# Altium PCB interface.PcbDoc (part 1 of 2)
Units mm, origin at the board's own origin, x right, y up, seen from the top; angles counter-clockwise.
Board outline 50 x 100 mm, 4 copper layers (Top Copper, GND, Supply, Bot Copper), stack 1.56 mm thick; 82 components, 62 nets, 291 pads, 101 vias.
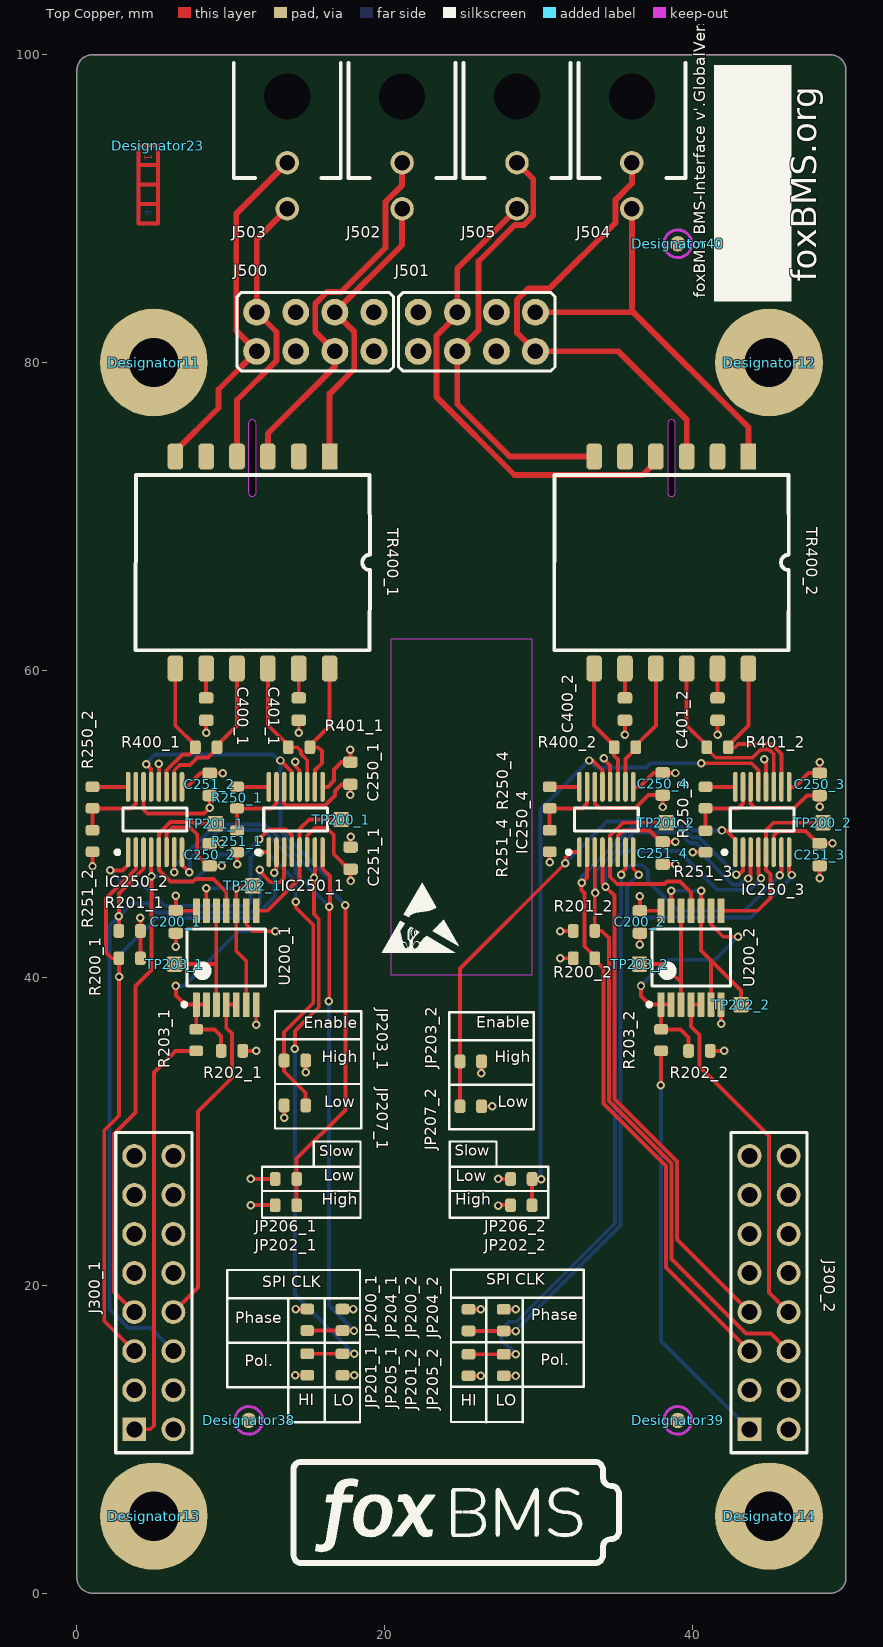
[diagram p0: Top Copper view]
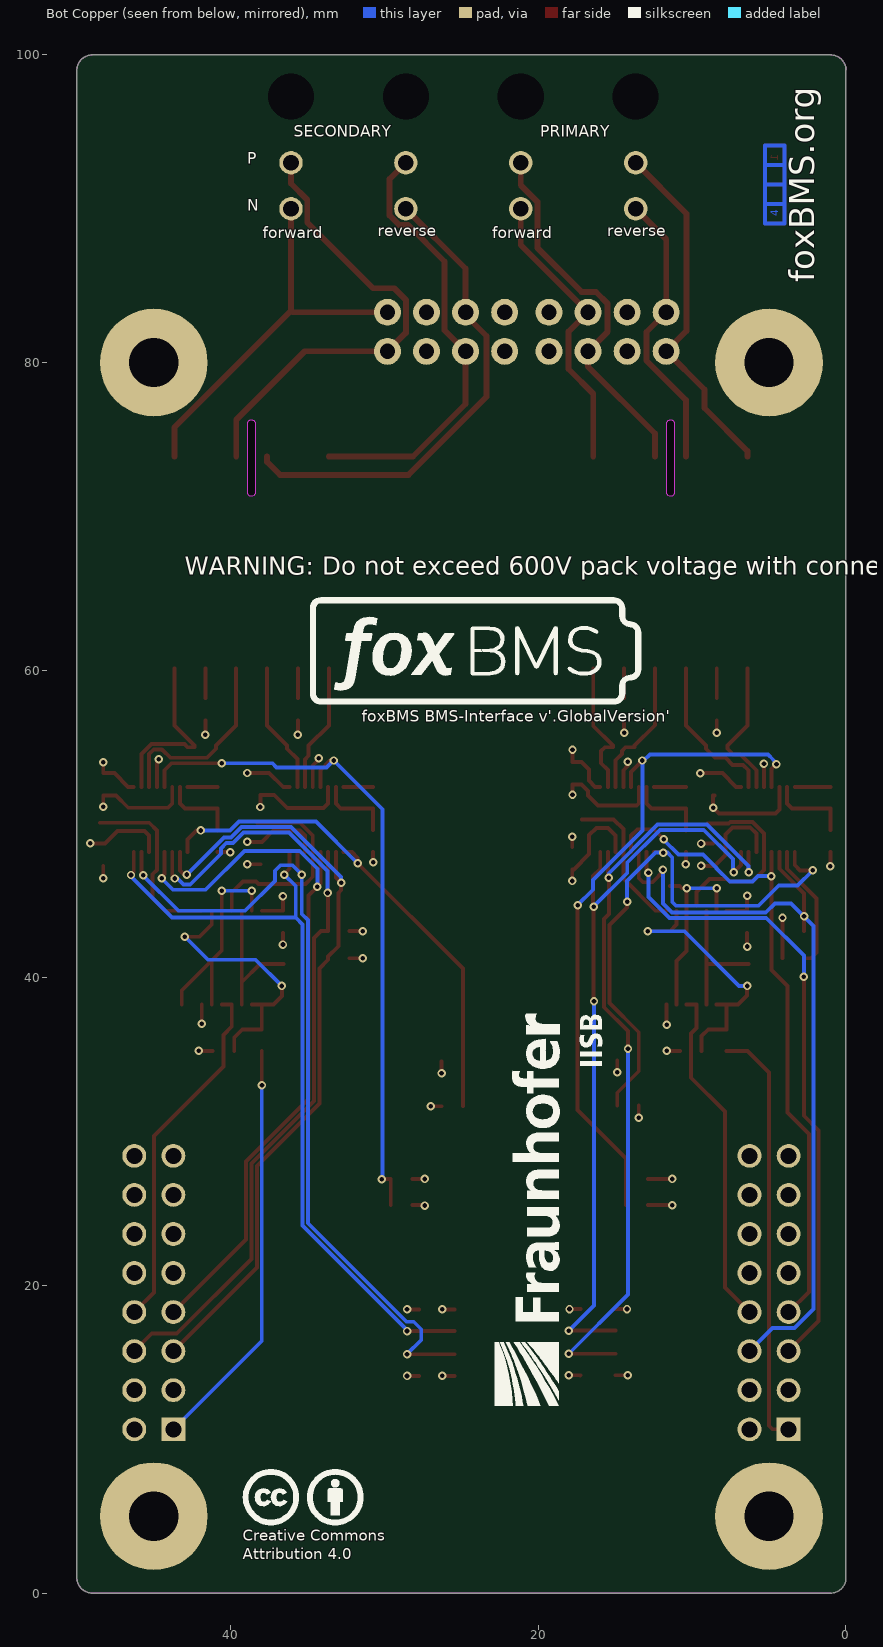
[diagram p1: Bot Copper view, seen from below]
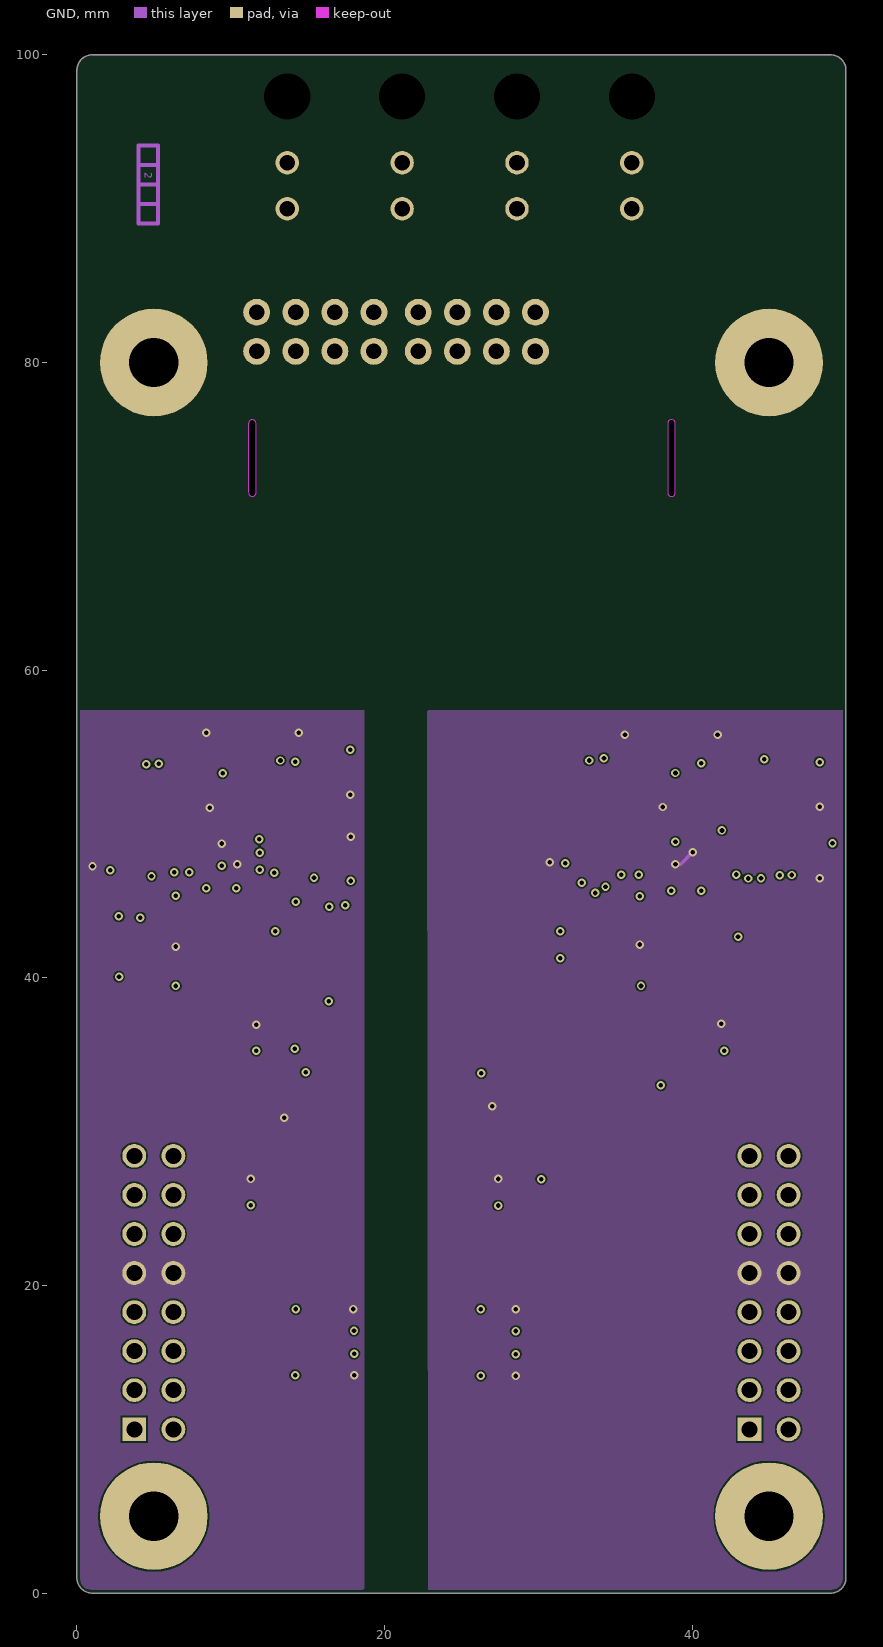
[diagram p2: GND]
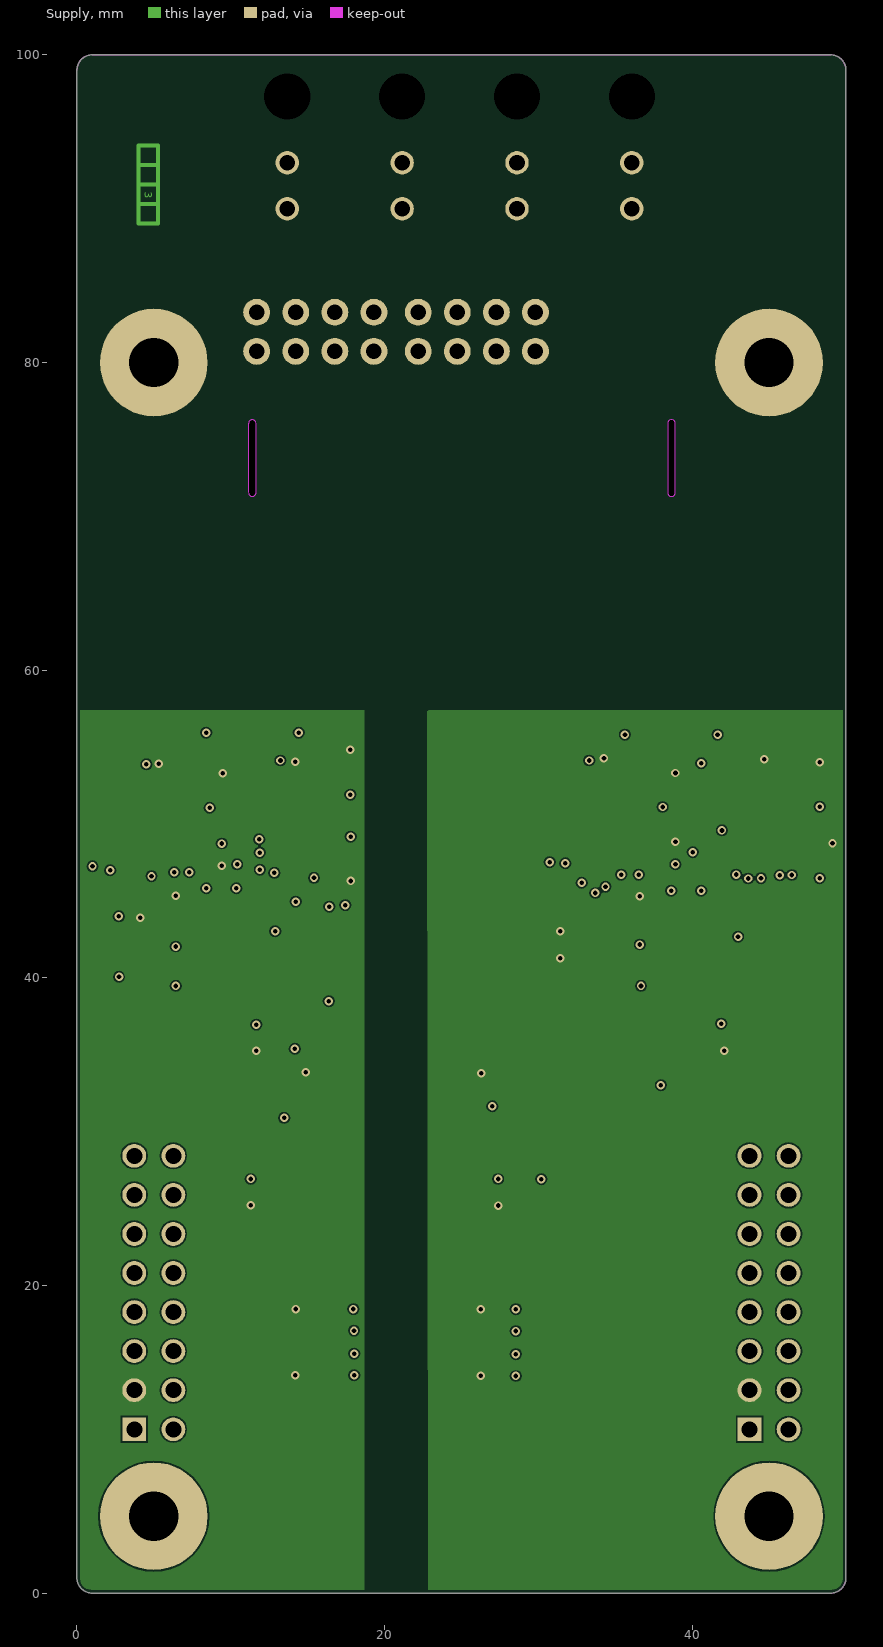
[diagram p3: Supply]

## Layer stack, top to bottom
Top Solder: solder mask 0.015, Solder Resist, Dk 3.5
Top Copper: signal copper 0.035
Dielectric 1: prepreg 0.36, FR-4, Dk 4.6
GND: signal copper 0.035
Dielectric 2: core 0.7, FR-4, Dk 4.6
Supply: signal copper 0.035
Dielectric 3: prepreg 0.36, FR-4, Dk 4.6
Bot Copper: signal copper 0.035
Bottom Solder: solder mask 0.015, Solder Resist, Dk 3.5

## Board outline
0,1 0,99 cw(c1,99) 1,100 49,100 cw(c49,99) 50,99 50,1 cw(c49,1) 49,0 1,0 cw(c1,1)
cut-out: 38.405,71.552 ccw(c38.655,71.552) 38.905,71.552 38.905,76.022 ccw(c38.655,76.022) 38.405,76.022
cut-out: 11.154,71.552 ccw(c11.405,71.552) 11.655,71.552 11.655,76.022 ccw(c11.405,76.022) 11.154,76.022

## Design rules (kind name [scope] priority, off if disabled: settings)
AssemblyTestPointUsage [All] p1 off:
AssemblyTestpoint [(IsPad And (OnTopLayer Or OnBottomLayer)) Or (IsPad And OnMultiLayer)] p1 off: testpointundercomponent=FALSE minsize=1.016 maxsize=2.54 preferedsize=1.524 minholesize=0 maxholesize=1.016 preferedholesize=0.813 testpointgrid=0.025 usegrid=TRUE gridtolerance=0 allowsidetop=TRUE
BoardOutlineClearance [All] p1: gap=0.203 ignorepadtopadclearanceinfootprint=FALSE except(0.508: Arc-CavityEdge Track-CavityEdge SMDPad-CavityEdge THPad-CavityEdge Via-CavityEdge Fill-CavityEdge Poly-CavityEdge Region-CavityEdge Text-CavityEdge)
Clearance [All] p1: gap=0.102 ignorepadtopadclearanceinfootprint=TRUE except(0.152: Arc-Text Arc-Hole Track-Text Track-Hole SMDPad-Text SMDPad-Hole THPad-Text THPad-Hole Via-Text Via-Hole Fill-Text Fill-Hole Poly-Text Poly-Hole Region-Text Region-Hole Text-Text Text-Hole; 0.203: Arc-Via Track-Via SMDPad-Via THPad-Via Via-Via)
DiffPairsRouting [All] p1: maxlimit=0.254 minlimit=0.254 mostfreqgap=0.254 toplayer_minwidth=0.381 toplayer_maxwidth=0.381 toplayer_prefwidth=0.381 midlayer1_minwidth=0.381 midlayer1_maxwidth=0.381 midlayer1_prefwidth=0.381 midlayer2_minwidth=0.381 midlayer2_maxwidth=0.381 midlayer2_prefwidth=0.381 bottomlayer_minwidth=0.381 bottomlayer_maxwidth=0.381 bottomlayer_prefwidth=0.381 maxuncoupledlength=12.7
FabricationTestpoint [All] p1: side=1 testpointundercomponent=TRUE minsize=0.508 maxsize=7.62 preferedsize=1.524 minholesize=0 maxholesize=1.05 preferedholesize=0.813 testpointgrid=0.025 allowsidetop=TRUE usegrid=FALSE gridtolerance=0
HoleSize [All] p1: absolutevalues=TRUE maxlimit=5.994 minlimit=0.2 maxpercent=80.000 minpercent=20.000
HoleToHoleClearance [All] p1: gap=0.152 allowstackedmicrovias=TRUE
MinimumAnnularRing [All] p1: minimumring=0.102
MinimumSolderMaskSliver [All] p1: minsoldermaskwidth=0.102
PlaneConnect [All] p1: planeconnectstyle=Direct reliefexpansion=0.508 reliefentries=4 reliefconductorwidth=0.254 reliefairgap=0.254
PolygonConnect [All] p1: connectstyle=Direct reliefconductorwidth=0.254 reliefentries=4 polygonreliefangle="90 Angle" airgapwidth=0.254
RoutingVias [All] p1: holewidth=0.203 width=0.45 viastyle="Through Hole" minholewidth=0.203 minwidth=0.45 maxholewidth=1 maxwidth=7 useviatemplates=TRUE viatemplateguid#1={D0A3D638-558F-4074-B05B-B31E3332276D} viatemplatename#1=0.3mm_tented
SMDEntry [All] p1: side=TRUE corner=TRUE anyangle=FALSE
SMDToCorner [All] p1: distance=40000
SilkToSolderMaskClearance [IsPad] p1: minsilkscreentomaskgap=0.102 clearancetoexposedcopper=FALSE
SolderMaskExpansion SolderMaskExpansion_VIAs [IsVia] p1: expansion=-10 // Cover all Vias
SolderMaskExpansion [All] p2: expansion=0.051
UnRoutedNet [All] p1: checkbadconnections=TRUE
UnpouredPolygon UnpouredPolygon_1 [All] p1:
Width [All] p1: maxlimit=1.524 minlimit=0.102 preferedwidth=0.152
19 further rules are at their usual default settings.

## Classes and differential pairs
channel class MCU_connector: "Primary MCU Connector" "Secondary MCU Connector"
channel class LTC6820_chip: "LTC6820 forward1" "LTC6820 forward2" "LTC6820 reverse1" "LTC6820 reverse2"
channel class LTC6820: "Primary LTC6820" "Secondary LTC6820"
channel class daisy-chain_isolation: "Primary Galvanic Isolation" "Secondary Galvanic Isolation"
component class "Secondary MCU Connector": J300_2
component class "Secondary LTC6820": C200_2 JP200_2 JP201_2 JP202_2 JP203_2 JP204_2 JP205_2 JP206_2 JP207_2 R200_2 R201_2 R202_2 R203_2 TP200_2 TP201_2 TP202_2 TP203_2 U200_2
component class "Secondary Galvanic Isolation": C400_2 C401_2 R400_2 R401_2 TR400_2
component class "Primary MCU Connector": J300_1
component class "Primary LTC6820": C200_1 JP200_1 JP201_1 JP202_1 JP203_1 JP204_1 JP205_1 JP206_1 JP207_1 R200_1 R201_1 R202_1 R203_1 TP200_1 TP201_1 TP202_1 TP203_1 U200_1
component class "Primary Galvanic Isolation": C400_1 C401_1 R400_1 R401_1 TR400_1
component class "LTC6820 reverse2": C250_4 C251_4 IC250_4 R250_4 R251_4
component class "LTC6820 reverse1": C250_2 C251_2 IC250_2 R250_2 R251_2
component class "LTC6820 forward2": C250_3 C251_3 IC250_3 R250_3 R251_3
component class "LTC6820 forward1": C250_1 C251_1 IC250_1 R250_1 R251_1
component class Board-to-Board-connector: J500 J501 J502 J503 J504 J505
polygon class PolygonThermal_ON_Width60000_Gap78740: Polygon_1_Net_+3.3V_0 Polygon_1_Net_GND_0
differential pair OUT_secondary: +OUT_secondary_P -OUT_secondary_N
differential pair OUT_reverse_secondary: +OUT_reverse_secondary_P -OUT_reverse_secondary_N
differential pair OUT_reverse_primary: +OUT_reverse_primary_P -OUT_reverse_primary_N
differential pair OUT_primary: +OUT_primary_P -OUT_primary_N
differential pair OUT_4: +OUT_4_P -OUT_4_N
differential pair OUT_3: +OUT_3_P -OUT_3_N
differential pair OUT_2: +OUT_2_P -OUT_2_N
differential pair OUT_1: +OUT_1_P -OUT_1_N

## Components (designator, comment, footprint, x,y, rotation, side; value= is the part's Value field where it differs from the comment)
C200_1 "100n/50V" CAPC1608X08N 6.43,43.636 r90 top (schematic designator C200)
C200_2 "100n/50V" CAPC1608X08N 36.602,43.636 r90 top (schematic designator C200)
C250_1 "100n/50V" CAPC1608X08N 17.78,53.303 r90 top (schematic designator C250)
C250_2 "100n/50V" CAPC1608X08N 8.636,48.006 r270 top (schematic designator C250)
C250_3 "100n/50V" CAPC1608X08N 48.285,52.578 r90 top (schematic designator C250)
C250_4 "100n/50V" CAPC1608X08N 38.075,52.603 r90 top (schematic designator C250)
C251_1 "100n/50V" CAPC1608X08N 17.795,47.777 r270 top (schematic designator C251)
C251_2 "100n/50V" CAPC1608X08N 8.636,52.578 r90 top (schematic designator C251)
C251_3 "100n/50V" CAPC1608X08N 48.285,48.006 r90 top (schematic designator C251)
C251_4 "100n/50V" CAPC1608X08N 38.075,48.108 r90 top (schematic designator C251)
C400_1 "27p/50V" CAPC1608X08N 8.404,57.468 r90 top locked (schematic designator C400)
C400_2 "27p/50V" CAPC1608X08N 35.63,57.468 r90 top locked (schematic designator C400)
C401_1 "27p/50V" CAPC1608X08N 14.423,57.468 r90 top locked (schematic designator C401)
C401_2 "27p/50V" CAPC1608X08N 41.649,57.468 r90 top locked (schematic designator C401)
Designator11 "Comment" Hole_3.2_Iso 5,80 r0 top
Designator12 "Comment" Hole_3.2_Iso 45,80 r0 top
Designator13 "Comment" Hole_3.2_Iso 5,5 r0 top
Designator14 "Comment" Hole_3.2_Iso 45,5 r0 top
Designator23 "Comment" layermarker4 5.266,94.107 r270 top
Designator38 "Comment" Fiducial_2 11.177,11.229 r0 top
Designator39 "Comment" Fiducial_2 39.066,11.229 r0 top
Designator40 "Comment" Fiducial_2 39.066,87.722 r0 top
IC250_1 "LTC6820HMS#PBF" LT-MS-16_M 14.224,50.292 r90 top (schematic designator IC250)
IC250_2 "LTC6820HMS#PBF" LT-MS-16_M 5.08,50.292 r90 top (schematic designator IC250)
IC250_3 "LTC6820HMS#PBF" LT-MS-16_M 44.552,50.292 r90 top (schematic designator IC250)
IC250_4 "LTC6820HMS#PBF" LT-MS-16_M 34.417,50.292 r90 top (schematic designator IC250)
J300_1 "SSW-108-01-G-D" SMTC-SSW-108-01-X-D 3.73,10.65 r90 top locked (schematic designator J300)
J300_2 "SSW-108-01-G-D" SMTC-SSW-108-01-X-D 43.73,10.65 r90 top locked (schematic designator J300)
J500 "TE_534206-4" TE_534206-4 15.5,82 r0 top locked
J501 "TE_534206-4" TE_534206-4 26,82 r0 top locked
J502 "molex_microfit_3_01x2_THT" MOLEX_MICROFIT_01x2_THT 21.144,97.307 r0 top locked
J503 "molex_microfit_3_01x2_THT" MOLEX_MICROFIT_01x2_THT 13.676,97.307 r0 top locked
J504 "molex_microfit_3_01x2_THT" MOLEX_MICROFIT_01x2_THT 36.079,97.307 r0 top locked
J505 "molex_microfit_3_01x2_THT" MOLEX_MICROFIT_01x2_THT 28.612,97.307 r0 top locked
JP200_1 "0R" RESC1608X05N 14.978,17.767 r90 top locked (schematic designator JP200)
JP200_2 "0R" RESC1608X05N 25.464,17.748 r90 top locked (schematic designator JP200)
JP201_1 "0R" RESC1608X05N 14.978,14.863 r270 top locked (schematic designator JP201)
JP201_2 "0R" RESC1608X05N 25.464,14.827 r270 top locked (schematic designator JP201)
JP202_1 "0R" RESC1608X05N 13.589,25.22 r180 top locked (schematic designator JP202)
JP202_2 "0R" RESC1608X05N 28.894,25.22 r180 top locked (schematic designator JP202)
JP203_1 "0R" RESC1608X05N 14.172,34.626 r0 top locked (schematic designator JP203)
JP203_2 "0R" RESC1608X05N 25.609,34.569 r0 top locked (schematic designator JP203)
JP204_1 "0R" RESC1608X05N 17.264,17.767 r270 top (schematic designator JP204)
JP204_2 "0R" RESC1608X05N 27.75,17.748 r270 top locked (schematic designator JP204)
JP205_1 "0R" RESC1608X05N 17.264,14.863 r90 top locked (schematic designator JP205)
JP205_2 "0R" RESC1608X05N 27.75,14.827 r90 top locked (schematic designator JP205)
JP206_1 "0R" RESC1608X05N 13.589,26.924 r0 top (schematic designator JP206)
JP206_2 "0R" RESC1608X05N 28.894,26.924 r0 top locked (schematic designator JP206)
JP207_1 "0R" RESC1608X05N 14.172,31.705 r0 top locked (schematic designator JP207)
JP207_2 "0R" RESC1608X05N 25.609,31.648 r180 top locked (schematic designator JP207)
R200_1 "2k" RESC1608X05N 3.429,41.275 r0 top locked (schematic designator R200)
R200_2 "2k" RESC1608X05N 32.969,41.275 r180 top locked (schematic designator R200)
R201_1 "2k" RESC1608X05N 3.429,43.053 r0 top locked (schematic designator R201)
R201_2 "2k" RESC1608X05N 32.969,43.053 r180 top locked (schematic designator R201)
R202_1 "20k" RESC1608X05N 10.081,35.253 r0 top locked (schematic designator R202)
R202_2 "20k" RESC1608X05N 40.468,35.253 r0 top locked (schematic designator R202)
R203_1 "0R" RESC1608X05N 7.763,35.953 r90 top locked (schematic designator R203)
R203_2 "0R" RESC1608X05N 37.982,35.953 r90 top locked (schematic designator R203)
R250_1 "806R" RESC1608X05N 10.414,51.717 r90 top locked (schematic designator R250)
R250_2 "806R" RESC1608X05N 1.016,51.717 r90 top locked (schematic designator R250)
R250_3 "806R" RESC1608X05N 40.869,51.717 r90 top locked (schematic designator R250)
R250_4 "806R" RESC1608X05N 30.738,51.717 r90 top locked (schematic designator R250)
R251_1 "1k2" RESC1608X05N 10.414,48.867 r90 top locked (schematic designator R251)
R251_2 "1k2" RESC1608X05N 1.016,48.895 r90 top locked (schematic designator R251)
R251_3 "1k2" RESC1608X05N 40.869,48.867 r90 top locked (schematic designator R251)
R251_4 "1k2" RESC1608X05N 30.738,48.895 r90 top locked (schematic designator R251)
R400_1 "120R" RESC1608X05N 8.404,54.991 r0 top locked (schematic designator R400)
R400_2 "120R" RESC1608X05N 35.63,54.991 r0 top locked (schematic designator R400)
R401_1 "120R" RESC1608X05N 14.446,54.991 r0 top locked (schematic designator R401)
R401_2 "120R" RESC1608X05N 41.649,54.991 r0 top locked (schematic designator R401)
TP200_1 "Testpoint_Square" Testpoint_S1 17.181,50.292 r90 top locked (schematic designator TP200)
TP200_2 "Testpoint_Square" Testpoint_S1 48.503,50.083 r90 top locked (schematic designator TP200)
TP201_1 "Testpoint_Square" Testpoint_S1 9.004,50.02 r90 top locked (schematic designator TP201)
TP201_2 "Testpoint_Square" Testpoint_S1 38.31,50.083 r90 top locked (schematic designator TP201)
TP202_1 "Testpoint_Square" Testpoint_S1 11.43,45.974 r90 top locked (schematic designator TP202)
TP202_2 "Testpoint_Square" Testpoint_S1 43.18,38.261 r90 top locked (schematic designator TP202)
TP203_1 "Testpoint_Square" Testpoint_S1 6.35,40.894 r90 top locked (schematic designator TP203)
TP203_2 "Testpoint_Square" Testpoint_S1 36.576,40.894 r90 top locked (schematic designator TP203)
TR400_1 "HM2102NL" HM2102NL 11.43,66.992 r270 top locked (schematic designator TR400)
TR400_2 "HM2102NL" HM2102NL 38.656,66.992 r270 top locked (schematic designator TR400)
U200_1 "SN74LVC00APWR" PW0014A_M 9.713,41.311 r90 top (schematic designator U200)
U200_2 "SN74LVC00APWR" PW0014A_M 39.932,41.311 r90 top (schematic designator U200)

## Footprints (in the part's own frame and the unit in brackets; to place one, negate y for a bottom-side part, rotate by r counter-clockwise, add the part's x,y. Pads: shape width x height; smd on the part's side, far side on the other; paste and mask are expansions set on the pad)
CAPC1608X08N [mm] "Chip Capacitor, 2-Leads, Body 1,60x0,80mm, IPC Medium Density"
  rrect50% 0.75x0.95 smd: 1(-0.725,0) 2(0.725,0)
  body extent -0.85,-0.45 0.85,0.45, height 0.8
Fiducial_2 [mm] "Fiducial Round 1mm"
  round 1 smd paste-0.5 mask+0.5: 0(0,0)
  Top Copper keep-out circle w0.2: c0,0 r0.9
HM2102NL [mil]
  rect 67.5x40 smd: 1(-271.65,196.85)
  rrect50% 67.5x40 smd: 2(-271.65,117.85) 3(-271.65,38.85) 4(-271.65,-40.15) 5(-271.65,-119.15) 6(-271.65,-198.15) 7(270.85,-198.15) 8(270.85,-119.15) 9(270.85,-40.15) 10(270.85,38.85) 11(270.85,117.85) 12(270.85,196.85)
  silkscreen extent -224,-300 224,300, body extent -224,-299 224,299, height 197
Hole_3.2_Iso [mm]
  round 7 hole 3.2: Hole_3.2(0,0)
layermarker4 [mm] "Marker for a 4 layerstack"
  Top Copper lines w0.254: 3.81,-1.27 5.08,-1.27 5.08,0 3.81,0 ; 3.81,-1.27 3.81,0 ; 3.81,-1.27 2.54,-1.27 ; 2.54,-1.27 2.54,0 ; 2.54,-1.27 1.27,-1.27 ; 1.27,-1.27 0,-1.27 0,0 1.27,0 ; 1.27,-1.27 1.27,0 ; 3.81,0 2.54,0 ; 2.54,0 1.27,0
  GND lines w0.254: 3.81,-1.27 2.54,-1.27 ; 3.81,-1.27 3.81,0 ; 3.81,-1.27 5.08,-1.27 5.08,0 3.81,0 ; 2.54,-1.27 2.54,0 ; 2.54,-1.27 1.27,-1.27 ; 1.27,-1.27 1.27,0 ; 1.27,-1.27 0,-1.27 0,0 1.27,0 ; 3.81,0 2.54,0 ; 2.54,0 1.27,0
  Supply lines w0.254: 3.81,-1.27 2.54,-1.27 ; 3.81,-1.27 3.81,0 ; 3.81,-1.27 5.08,-1.27 5.08,0 3.81,0 ; 2.54,-1.27 2.54,0 ; 2.54,-1.27 1.27,-1.27 ; 1.27,-1.27 1.27,0 ; 1.27,-1.27 0,-1.27 0,0 1.27,0 ; 3.81,0 2.54,0 ; 2.54,0 1.27,0
  Bot Copper lines w0.254: 3.81,-1.27 2.54,-1.27 ; 3.81,-1.27 3.81,0 ; 3.81,-1.27 5.08,-1.27 5.08,0 3.81,0 ; 2.54,-1.27 2.54,0 ; 2.54,-1.27 1.27,-1.27 ; 1.27,-1.27 1.27,0 ; 1.27,-1.27 0,-1.27 0,0 1.27,0 ; 3.81,0 2.54,0 ; 2.54,0 1.27,0
LT-MS-16_M [mm] "SOP, 16-Leads, Body 4.04x3.00mm, Pitch 0.50mm, IPC Low Density"
  oval 1.95x0.3 smd: 1(-2.125,1.75) 2(-2.125,1.25) 3(-2.125,0.75) 4(-2.125,0.25) 5(-2.125,-0.25) 6(-2.125,-0.75) 7(-2.125,-1.25) 8(-2.125,-1.75) 9(2.125,-1.75) 10(2.125,-1.25) 11(2.125,-0.75) 12(2.125,-0.25) 13(2.125,0.25) 14(2.125,0.75) 15(2.125,1.25) 16(2.125,1.75)
  silkscreen extent -2.25,-2.08 0.75,2.57, body extent -1.55,-2.05 1.55,2.05, height 1.1
MOLEX_MICROFIT_01x2_THT [mil] "Micro-Fit 3.0 Right Angle Header, 3.00mm Pitch, Dual Row, 2 Circuits, with Snap-in Plastic Peg PCB Lock, Tin, Glow Wire Capable, Black, 43045-0200"
  round 60 hole 40: 1(0,-170) 2(0,-287.99)
  round 39.37 hole 117.99 unplated paste+0 mask+4: ""(0,0)
  silkscreen extent -137,-209 137,85, body extent -141,-301 141,181, height 345
PW0014A_M [mm] "SOP, 14-Leads, Body 5.1x4.5mm, Pitch 0.65mm, IPC Low Density"
  rrect22% 1.6x0.45 smd: 1(-3.05,1.95) 2(-3.05,1.3) 3(-3.05,0.65) 4(-3.05,0) 5(-3.05,-0.65) 6(-3.05,-1.3) 7(-3.05,-1.95) 8(3.05,-1.95) 9(3.05,-1.3) 10(3.05,-0.65) 11(3.05,0) 12(3.05,0.65) 13(3.05,1.3) 14(3.05,1.95)
  silkscreen extent -3.17,-2.55 1.85,2.85, body extent -3.21,-2.5 3.21,2.5, height 1
RESC1608X05N [mm] "Chip Resistor, 2-Leads, Body 1,60x0,80mm, IPC Medium Density"
  rrect50% 0.7x0.9 smd: 1(-0.7,0) 2(0.7,0)
  body extent -0.85,-0.45 0.85,0.45, height 0.45
SMTC-SSW-108-01-X-D [mm] "SQ Post Socket, 2x8 Pins, Vertical, 2.54mm Pitch, Female"
  rect 1.55x1.55 hole 1.04: 1(0,0)
  round 1.55 hole 1.04: 2(0,-2.54) 3(2.54,0) 4(2.54,-2.54) 5(5.08,0) 6(5.08,-2.54) 7(7.62,0) 8(7.62,-2.54) 9(10.16,0) 10(10.16,-2.54) 11(12.7,0) 12(12.7,-2.54) 13(15.24,0) 14(15.24,-2.54) 15(17.78,0) 16(17.78,-2.54)
  silkscreen extent -1.53,-3.74 19.31,1.2, body extent -1.52,-3.75 19.3,1.21, height 8.51
TE_534206-4 [mm] "Board-To-Board Connector, Dual, 2.54 mm, 8 Contacts, Receptacle, Through Hole, 2 Rows"
  round 1.75 hole 1: 1(3.81,-1.27) 2(3.81,1.27) 3(1.27,-1.27) 4(1.27,1.27) 5(-1.27,-1.27) 6(-1.27,1.27) 7(-3.81,-1.27) 8(-3.81,1.27)
  silkscreen extent -5.08,-2.54 5.08,2.54, body extent -5.08,-2.51 5.08,2.51, height 8.65
Testpoint_S1 [mm] "Testpunkt, quardratisch 1mm"
  rrect20% 1x1 smd paste-0.5: 1(0,0)

## Part data
C200_1 C200_2 C250_1 C250_2 C250_3 C250_4 C251_1 C251_2 C251_3 C251_4: library part gen_C_ceramic_100n_50V_X7R_0603, "MLCC", Capacitance=100n, Case EIA=0603, Case Metric=1608, Dielectric=X7R, PnP Package=C_0603_10, PnP Value=100n/50V/X7R, Rated Voltage=50V, Supplier Part Number 1=2525267, Automotive Qualified=True, Part Number=gen_C_ceramic_100n_50V_X7R_0603, PnP equipped=x, Supplier 1=Farnell, Supplier 2=Digikey, Supplier 3=Farnell, Supplier Part Number 2=490-6049-1-ND, Supplier Part Number 3=2070398
C400_1 C400_2 C401_1 C401_2: library part gen_C_ceramic_27p_50V_NP0_0603, "MLCC", Capacitance=27p, Case EIA=0603, Case Metric=1608, Dielectric=NP0, PnP Package=C_0603_05, Rated Voltage=50V, Supplier Part Number 1=2219430, Automotive Qualified=True, Part Number=gen_C_ceramic_27p_50V_NP0_0603, Supplier 1=Farnell
Designator23: library part Layer_Marker_4_Layers
Designator38 Designator39 Designator40: library part Fiducial_2
IC250_1 IC250_2 IC250_3 IC250_4: library part CMP-0937-00009-1, "IsoSPI Isolated Communication Interface, 2.7 to 5.5 V, -40 to 125 degC, 16-Pin MSOP (MS), Pb-Free", IO Supply Current="1 uA Max.", IO Supply Voltage Range="1.7 to 5.5 V", Manufacturer="Linear Technology", Power Supply="2.7 to 5.5 V", Receiver Input Resistance="35 kOhm", Supply Current, IDLE State="2 uA", Temperature Range (degC)="-40 to 125", ComponentLink1Description="Manufacturer URL", ComponentLink1URL=http://www.linear.com/, ComponentLink2Description=Datasheet, ComponentLink2URL=http://cds.linear.com/docs/en/datasheet/6820fa.pdf, ComponentLink3Description="Package Specification", ComponentLink3URL=http://cds.linear.com/docs/en/packaging/05081669_A_MS16.pdf, DatasheetVersion="Rev. A", Mounting Technology="Surface Mount", PackageDescription="16-Pin Micro Small Outline Package, Body 4.039 x 3 mm, Pitch 0.5 mm", PackageReference=MS-16, PackageVersion="Rev. A", PartNumber=LTC6820HMS#PBF, VBIAS="1.9 to 2.1 V"
J300_1 J300_2: library part CMP-1023-00374-1, "SQ Post Socket, Through-hole, Vertical, -55 to 125 degC, 2.54mm Pitch, 16-Pin, Female, RoHS", Manufacturer=Samtec, Temperature Range="-55 to 125 degC", ComponentLink1Description="Manufacturer URL", ComponentLink1URL=http://www.samtec.com, ComponentLink2Description=Datasheet, ComponentLink2URL=http://www.samtec.com/documents/webfiles/pdf/SSW_TH.PDF, ComponentLink3Description="Package Specification", ComponentLink3URL=http://www.samtec.com/documents/webfiles/cpdf/SSW-1XX-XX-XXX-X-XX-XXX-XX-MKT.pdf, DatasheetVersion=F-214, Mounting Technology=Through-hole, Orientation=Vertical, PackageDescription="Assembly, Socket Strip .016 X .031 Tail", PackageReference=SSW-108-01-X-D, PackageVersion="CA, 6/1987", PartNumber=SSW-108-01-G-D, Pitch="2.54 mm", RoHS=True
J500 J501: "Board-To-Board Connector, Dual, 2.54 mm, 8 Contacts, Receptacle, Through Hole, 2 Rows", Manufacturer=TE, Operating Temperature="-65 °C - +105 °C", Part Name=534206-4, Rated Current=2A, Rated Voltage="333V AC", Supplier Part Number 1=A26454-ND, Automotive Qualified=False, Circuits=8, ComponentLink1Description=Datasheet, ComponentLink1URL=https://www.te.com/deu-de/product-534206-4.html#pdp-docs-features, Part Number=TE_534206-4, Supplier 1=Digikey
J502 J503 J504 J505: "Micro-Fit 3.0 Right Angle Header, 3.00mm Pitch, Dual Row, 2 Circuits, with Snap-in Plastic Peg PCB Lock, Tin, Glow Wire Capable, Black, 43045-0200", Manufacturer=Molex, Operating Temperature="-40°C - +105°C", Part Name=MicroFit, Rated Current=8.5A, Rated Voltage=600V, Supplier Part Number 1=1012251, Automotive Qualified=False, Circuits=2, Part Number=molex_microfit_3_01x2_THT, Supplier 1=Farnell
JP200_1 JP200_2 JP201_1 JP201_2 JP202_1 JP202_2 JP203_1 JP203_2 JP204_1 JP204_2 JP205_1 JP205_2 JP206_1 JP206_2 JP207_1 JP207_2 R203_1 R203_2: library part gen_R_0R_0603, "SMD Resistor 0R 0603", Case EIA=0603, Case Metric=1608, Maximum Working Voltage=75V, Operating Temperature="-55°C - +155°C", PnP Package=R_0603, Power=0.1W, Supplier Part Number 1=2616580, Automotive Qualified=True, Part Number=gen_R_0R_0603, PnP Value=0R, Resistance=0R, Series=Jumper, Supplier 1=Farnell
R200_1 R200_2 R201_1 R201_2: library part gen_R_2k_0603, "SMD Resistor 2k 0603", Case EIA=0603, Case Metric=1608, Maximum Working Voltage=75V, Operating Temperature="-55°C - +155°C", PnP Package=R_0603, Power=0.1W, Supplier Part Number 1=2059343, Tolerance=1%, Automotive Qualified=True, Part Number=gen_R_2k_0603, PnP Value=2k, Resistance=2k, Series="E24, E96", Supplier 1=Farnell
R202_1 R202_2: library part gen_R_20k_0603, "SMD Resistor 20k 0603", Case EIA=0603, Case Metric=1608, Maximum Working Voltage=75V, Operating Temperature="-55°C - +155°C", PnP Package=R_0603, Power=0.1W, Supplier Part Number 1=2059432, Tolerance=1%, Automotive Qualified=True, Part Number=gen_R_20k_0603, PnP Value=20k, Resistance=20k, Series="E24, E96", Supplier 1=Farnell
R250_1 R250_2 R250_3 R250_4: library part gen_R_806R_0603, "SMD Resistor 806R 0603", Case EIA=0603, Case Metric=1608, Maximum Working Voltage=75V, Operating Temperature="-55°C - +155°C", PnP Package=R_0603, Power=0.1W, Supplier Part Number 1=2059324, Tolerance=1%, Automotive Qualified=True, Part Number=gen_R_806R_0603, PnP Value=806R, Resistance=806R, Series=E96, Supplier 1=Farnell
R251_1 R251_2 R251_3 R251_4: library part gen_R_1k2_0603, "SMD Resistor 1k2 0603", Case EIA=0603, Case Metric=1608, Maximum Working Voltage=75V, Operating Temperature="-55°C - +155°C", PnP Package=R_0603, Power=0.1W, Supplier Part Number 1=2073370, Tolerance=1%, Automotive Qualified=True, Part Number=gen_R_1k2_0603, PnP Value=1k2, Resistance=1k2, Series=E24, Supplier 1=Farnell
R400_1 R400_2 R401_1 R401_2: library part gen_R_120R_0603, "SMD Resistor 120R 0603", Case EIA=0603, Case Metric=1608, Maximum Working Voltage=75V, Operating Temperature="-55°C - +155°C", PnP Package=R_0603, Power=0.1W, Supplier Part Number 1=1652832, Tolerance=1%, Automotive Qualified=True, Part Number=gen_R_120R_0603, PnP Value=120R, Resistance=120R, Series=E24, Supplier 1=Farnell
TP200_1 TP200_2 TP201_1 TP201_2 TP202_1 TP202_2 TP203_1 TP203_2: "Testpoint, square", Part Number=Testpoint_Square
TR400_1 TR400_2: "Pulse HM2102NL BMS Transformer", Manufacturer=Pulse, Operating Temperature="-40°C - +125°C", Supplier Part Number 1=673-HM2102NL, Automotive Qualified=True, ComponentLink1Description=Datasheet, ComponentLink1URL=https://www.mouser.com/ds/2/336/HM2102NL-1218600.pdf, Part Number=HM2102NL, Supplier 1=Mouser, Supplier 2=Digikey, Supplier Part Number 2=1840-1034-1-ND
U200_1 U200_2: library part CMP-1627-00586-2, "Quadruple 2-Input Positive-NAND Gate, PW0014A, LARGE T&R", F @ Nom Voltage(Max)(Mhz)=150, Generic Part Number=SN74LVC00A, ICC @ Nom Voltage(Max)(mA)=0.04, Manufacturer="Texas Instruments", Operating Temperature Range(C)="-40 to 125", Rating=Catalog, tpd @ Nom Voltage(Max)(ns)=12.5,6.4,5.1,4.3, Voltage(Nom)(V)=1.8,2.5,2.7,3.3, Code_JEDEC=MO-153, DatasheetVersion=SCAS279Q, Input Type=TTL, Output Drive (IOL/IOH)(Max)(mA)=24/-24, Output Type=TTL, PackageReference=PW0014A, Schmitt Trigger=No, Technology Family=LVC, VCC(Max)(V)=3.6, VCC(Min)(V)=1.65

## Via types
v1: diameter 0.55, hole 0.3, Top Copper to Bot Copper, tented both sides, 101 vias

## Nets (pads, with @x,y where several pads share a name; then routed paths per layer and width w, separated by ;. In a path a pad name is that pad's centre, name@x,y a point inside that pad or via, vN(x,y) a via of type N, cw(c..) or ccw(c..) an arc to the next point about the centre after c; other vN are vias at no path point)
+3.3V_0: C200_1.2 C250_1.2 C250_2.2 C251_1.2 C251_2.2 IC250_1.6 IC250_1.9 IC250_1.12 IC250_2.6 IC250_2.9 IC250_2.12 J300_1.3 JP200_1.2 JP201_1.2 JP202_1.2 JP203_1.2 R200_1.2 R201_1.2 R202_1.2 U200_1.14 | length 33.1
  Top Copper w0.254: R200_1.2 R201_1.2 v1(4.129,43.917) ; IC250_2.12 5.33,53.92 v1(5.334,53.924) ; IC250_2.6 5.83,49.391 6.223,49.784 7.366,49.784 7.823,49.327 7.823,47.994 8.536,47.281 C250_2.2 v1(9.423,47.281) ; v1(6.43,45.342) C200_1.2 U200_1.14 ; IC250_2.9 7.154,52.417 8.04,53.303 C251_2.2 v1(9.474,53.303) ; R202_1.2 11.65,35.253 v1(11.663,35.265) ; v1@11.377,25.22 JP202_1.2 ; v1(14.195,14.163) JP201_1.2 ; v1(14.199,54.051) 14.199,53.769 14.474,53.494 IC250_1.12 ; v1(14.237,18.467) JP200_1.2 ; v1(14.872,33.864) JP203_1.2 ; IC250_1.6 14.974,49.244 15.475,49.745 16.232,49.745 16.701,49.276 16.701,48.047 17.695,47.052 C251_1.2 v1(17.795,46.297) ; IC250_1.9 16.317,52.417 16.72,52.819 16.72,53.544 17.203,54.028 C250_1.2 v1(17.78,54.827)
  other v1: 11.303,25.22
+3.3V_1: C200_2.2 C250_3.2 C250_4.2 C251_3.2 C251_4.2 IC250_3.6 IC250_3.9 IC250_3.12 IC250_4.6 IC250_4.9 IC250_4.12 J300_2.3 JP200_2.2 JP201_2.2 JP202_2.2 JP203_2.2 R200_2.2 R201_2.2 R202_2.2 U200_2.14 | length 28.9
  Top Copper w0.254: JP201_2.2 v1@26.212,14.127 ; JP200_2.2 26.24,18.448 v1(26.251,18.459) ; v1(26.295,33.807) 26.309,33.821 JP203_2.2 ; v1@27.305,25.197 27.328,25.22 JP202_2.2 ; v1(31.42,43.028) 31.42,43.053 R201_2.2 ; v1@31.521,41.275 R200_2.2 ; v1(34.265,54.28) 34.265,54.204 34.667,53.801 IC250_4.12 ; IC250_4.6 35.167,49.244 35.494,49.571 37.236,49.571 37.975,48.833 C251_4.2 38.901,48.833 v1(38.913,48.844) ; IC250_4.9 36.587,52.417 37.498,53.328 C250_4.2 38.899,53.328 v1(38.913,53.315) ; v1(36.602,45.306) C200_2.2 U200_2.14 ; R202_2.2 v1(42.082,35.253) ; v1(44.679,54.204) 44.78,54.204 44.802,54.182 IC250_3.12 ; IC250_3.6 45.302,49.244 45.613,49.555 47.361,49.555 48.185,48.731 C251_3.2 49.112,48.731 v1(49.124,48.743) ; IC250_3.9 46.677,52.417 47.563,53.303 C250_3.2 v1(48.285,54.026)
  Supply w0.254: v1@26.212,14.127 v1@26.226,14.141
  other v1: 26.251,14.127 27.381,25.197 31.42,41.275
+5.0V_0: J300_1.4
+5.0V_1: J300_2.4
BMS-INTERFACE_DIR_1: J300_1.1 R203_1.1 | length 27.7
  Top Copper w0.254: J300_1.1 4.771,10.65 5,10.879 5,33.84 6.413,35.253 R203_1.1
BMS-INTERFACE_DIR_2: J300_2.1 R203_2.1 | length 27
  Top Copper w0.254: v1(37.968,33.02) 37.982,33.034 R203_2.1
  Bot Copper w0.254: v1(37.968,33.02) 37.982,33.006 37.982,16.398 J300_2.1
BMS-INTERFACE_SPI_MISO_1: IC250_1.3 IC250_2.3 J300_1.6 R201_1.1 | length 52.9
  Top Copper w0.254: R201_1.1 v1(2.729,43.993) 2.729,45.489 4.33,47.09 IC250_2.3 ; v1(11.899,47.028) 11.899,47.027 11.839,46.966 12.59,46.215 13.194,46.215 13.474,46.495 IC250_1.3
  Bot Copper w0.254: J300_1.6 4.777,17.223 3.358,17.223 2.113,18.468 2.113,43.376 v1(2.729,43.993) 3.579,44.843 4.616,44.843 5.215,44.244 11.32,44.244 11.899,44.823 v1(11.899,47.028)
BMS-INTERFACE_SPI_MISO_2: IC250_3.3 IC250_4.3 J300_2.6 R201_2.1 | length 54.9
  Top Copper w0.254: IC250_4.3 33.667,45.556 v1(33.706,45.517) 33.669,45.48 R201_2.1 34.121,43.053 34.595,42.579 34.595,31.981 38.659,27.917 38.659,21.717 43.51,16.866 45.134,16.866 J300_2.6 ; v1(43.637,46.457) 43.802,46.621 IC250_3.3
  Bot Copper w0.254: v1@33.782,45.593 v1(33.706,45.517) 33.706,46.934 36.221,49.449 39.163,49.449 39.841,48.772 40.29,48.772 40.644,48.418 40.644,48.067 42.631,46.08 43.075,46.08 43.452,46.457 v1(43.637,46.457)
BMS-INTERFACE_SPI_MOSI_1: IC250_1.2 IC250_2.2 J300_1.5 R200_1.1 | length 53.5
  Top Copper w0.254: v1(2.739,40.067) 2.739,37.664 ; J300_1.5 1.778,17.682 1.778,30.074 2.739,31.035 2.739,37.664 ; IC250_2.2 3.83,47.093 1.905,45.168 1.905,41.647 2.277,41.275 R200_1.1 2.729,37.654 2.739,37.664 ; v1(12.841,46.82) 12.841,46.957 12.974,47.09 IC250_1.2
  Bot Copper w0.254: v1(2.739,40.067) 2.739,41.443 5.184,43.888 11.467,43.888 12.841,45.262 v1(12.841,46.82)
BMS-INTERFACE_SPI_MOSI_2: IC250_3.2 IC250_4.2 J300_2.5 R200_2.1 | length 51.9
  Top Copper w0.254: IC250_4.2 33.167,46.527 v1(32.817,46.177) 32.817,45.695 32.995,45.517 32.995,42.05 33.669,41.375 R200_2.1 33.669,41.175 34.239,40.605 34.239,31.834 38.303,27.77 38.303,21.157 J300_2.5 ; v1(42.853,46.714) 43.031,46.714 43.035,46.71 43.302,46.977 IC250_3.2
  Bot Copper w0.254: v1@32.842,46.152 v1(32.817,46.177) 32.817,46.548 36.074,49.805 39.311,49.805 39.988,49.128 40.439,49.128 v1(42.853,46.714)
BMS-INTERFACE_SPI_SCK_1: IC250_1.4 IC250_2.4 J300_1.7 | length 44.3
  Top Copper w0.254: J300_1.7 2.413,19.587 2.413,29.845 3.81,31.242 3.81,39.472 4.851,40.513 4.851,45.737 ; IC250_2.4 4.83,45.767 4.826,45.763 4.851,45.737 ; v1(4.851,46.609) 4.851,45.737 ; v1(11.846,49.006) 12.497,49.657 13.561,49.657 13.974,49.244 IC250_1.4
  Bot Copper w0.254: v1(4.851,46.609) 5.728,46.609 6.079,46.258 7.56,46.258 8.415,47.113 8.415,47.129 9.296,48.009 10.9,48.009 11.846,48.955 v1(11.846,49.006)
BMS-INTERFACE_SPI_SCK_2: IC250_3.4 IC250_4.4 J300_2.7 | length 48.7
  Top Copper w0.254: IC250_4.4 34.167,46.122 v1(34.366,45.923) 34.95,45.339 34.95,32.128 39.014,28.064 39.014,22.985 J300_2.7 ; IC250_3.4 44.302,46.757 44.475,46.584 v1(44.475,46.482)
  Bot Copper w0.254: v1(34.366,45.923) 34.366,47.092 35.514,48.239 39.111,48.239 41.626,45.724 43.761,45.724 44.475,46.439 v1(44.475,46.482)
C\S\_1: J300_1.8 U200_1.4 U200_1.5 | length 22.4
  Top Copper w0.254: J300_1.8 7.874,19.874 7.874,31.297 10.081,33.504 10.081,36.379 9.713,36.748 U200_1.4 U200_1.5
C\S\_2: J300_2.8 U200_2.4 U200_2.5 | length 23.3
  Top Copper w0.254: U200_2.5 U200_2.4 39.932,36.826 40.468,36.29 40.468,34.238 45,29.707 45,19.54 J300_2.8
C\S\_\F\W\_1: IC250_1.5 TP200_1.1 U200_1.8 | length 9.9
  Top Copper w0.254: U200_1.8 12.387,44.361 14.474,46.447 IC250_1.5 14.474,49.663 15.103,50.292 TP200_1.1
C\S\_\F\W\_2: IC250_3.5 TP200_2.1 U200_2.8 | length 12
  Top Copper w0.254: U200_2.8 44.252,44.361 45.081,45.19 45.081,46.733 44.802,47.012 IC250_3.5 44.802,49.586 45.298,50.083 TP200_2.1
C\S\_\R\V\_1: IC250_2.5 TP201_1.1 U200_1.11 | length 12.4
  Top Copper w0.254: TP201_1.1 7.633,50.02 7.513,50.14 6.076,50.14 5.33,49.394 IC250_2.5 5.33,47.007 6.079,46.258 7.56,46.258 7.73,46.428 8.87,46.428 9.713,45.585 U200_1.11@9.713,44.684
C\S\_\R\V\_2: IC250_4.5 TP201_2.1 U200_2.11 | length 13.7
  Top Copper w0.254: TP201_2.1 35.503,50.083 34.667,49.246 IC250_4.5 34.667,46.57 35.132,46.105 38.197,46.105 38.357,46.266 39.202,46.266 39.932,45.537 U200_2.11
CS_1: TP202_1.1 U200_1.6 U200_1.10 U200_1.13 | length 12.4
  Top Copper w0.254: U200_1.13 v1(8.413,45.822) ; U200_1.6 11.013,41.081 10.363,41.731 U200_1.10 v1(10.363,45.822) 10.677,45.822 10.828,45.974 TP202_1.1
  Bot Copper w0.254: v1@8.415,45.822 v1(10.363,45.822)
CS_2: TP202_2.1 U200_2.6 U200_2.10 U200_2.13 | length 14.6
  Top Copper w0.254: U200_2.13 v1(38.632,45.661) ; v1(40.582,45.661) U200_2.10 40.582,41.764 41.232,41.114 ; U200_2.6 41.232,41.114 ; TP202_2.1 43.18,39.166 41.232,41.114
  Bot Copper w0.254: v1(38.632,45.661) v1(40.582,45.661)
D\I\R\_1: TP203_1.1 U200_1.3 U200_1.12 | length 8.8
  Top Copper w0.254: TP203_1.1 9.063,40.894 ; U200_1.3 9.063,40.894 ; U200_1.12 9.063,40.894
D\I\R\_2: TP203_2.1 U200_2.3 U200_2.12 | length 9.3
  Top Copper w0.254: TP203_2.1 38.1,40.894 39.282,39.712 ; U200_2.3 39.282,39.712 ; U200_2.12 39.282,39.712
DIR_1: R202_1.1 R203_1.2 U200_1.1 U200_1.2 U200_1.9 | length 18.1
  Top Copper w0.254: v1(6.43,39.472) 6.43,38.849 7.018,38.261 U200_1.1 ; U200_1.2 U200_1.1 ; R202_1.1 9.381,36.227 8.954,36.653 R203_1.2 U200_1.1 ; U200_1.9 11.013,43.459 11.444,43.028 v1(12.889,43.028)
  Bot Copper w0.254: v1(6.43,39.472) 6.956,39.472 10.512,43.028 v1(12.889,43.028)
DIR_2: R202_2.1 R203_2.2 U200_2.1 U200_2.2 U200_2.9 | length 17.9
  Top Copper w0.254: v1(36.672,39.472) 36.672,38.818 37.229,38.261 U200_2.1 ; U200_2.2 U200_2.1 ; R202_2.1 39.768,36.133 39.248,36.653 R203_2.2 U200_2.1 ; U200_2.9 41.232,43.459 42.019,42.672 v1(42.982,42.672)
  Bot Copper w0.254: v1(36.672,39.472) 38.376,41.175 41.485,41.175 v1(42.982,42.672)
EN-BACKUP_1: IC250_1.1 IC250_2.1 JP203_1.1 JP207_1.2 | length 36.1
  Top Copper w0.254: v1(2.159,46.99) 2.978,46.99 3.33,47.342 IC250_2.1 ; v1(11.892,48.139) 11.92,48.167 IC250_1.1 ; v1(14.227,44.958) 14.227,44.574 15.367,43.434 15.367,38.356 13.472,36.461 JP203_1.1 13.472,33.929 14.872,32.529 JP207_1.2
  Bot Copper w0.254: v1(2.159,46.99) 3.145,46.004 4.369,46.004 5.69,44.684 11.046,44.684 11.294,44.932 11.294,47.817 11.616,48.139 v1(11.892,48.139) 12.378,48.139 14.227,46.29 v1(14.227,44.958)
EN-BACKUP_2: IC250_3.1 IC250_4.1 JP203_2.1 JP207_2.2 | length 33.5
  Top Copper w0.254: JP207_2.2 24.909,34.017 JP203_2.1 24.909,40.606 v1(31.75,47.447) 31.75,47.803 32.114,48.167 IC250_4.1 ; v1(41.935,49.581) 42.213,49.581 42.802,48.992 IC250_3.1
  Bot Copper w0.254: v1(31.75,47.447) 34.463,50.161 39.458,50.161 40.038,49.581 v1(41.935,49.581)
GND_0: C200_1.1 C250_1.1 C250_2.1 C251_1.1 C251_2.1 C400_1.1 C401_1.1 IC250_1.14 IC250_2.14 J300_1.9 J300_1.10 JP204_1.1 JP205_1.1 JP206_1.1 JP207_1.1 R251_1.1 R251_2.1 U200_1.7 | length 24.8
  Top Copper w0.254: v1(1.016,47.244) R251_2.1 ; IC250_2.14 4.33,50.939 4.596,50.673 8.255,50.673 v1(8.636,51.054) C251_2.1 C251_2.1@8.536,51.853 ; v1(6.43,42.034) C200_1.1 ; v1@8.404,55.88 v1(8.404,55.935) C400_1.1 ; C250_2.1 v1(9.423,48.731) 9.435,48.731 v1@9.449,48.717 ; v1(10.414,47.371) R251_1.1 R251_1.1@10.414,48.195 ; v1(11.303,26.924) JP206_1.1 ; v1(11.663,36.961) U200_1.7 ; v1@13.41,30.892 13.472,30.954 JP207_1.1 ; IC250_1.14 13.474,51.34 13.601,51.213 16.131,51.213 16.77,51.853 16.77,52.145 17.203,52.578 C250_1.1 v1(17.78,51.906) ; v1(14.423,55.935) C401_1.1 ; JP204_1.1 v1(17.975,18.467) ; JP205_1.1@17.278,14.149 JP205_1.1 v1(18.026,14.163) ; C251_1.1 v1(17.795,49.174)
  other v1: 13.472,30.892
GND_1: C200_2.1 C250_3.1 C250_4.1 C251_3.1 C251_4.1 C400_2.1 C401_2.1 IC250_3.14 IC250_4.14 J300_2.9 J300_2.10 JP204_2.1 JP205_2.1 JP206_2.1 JP207_2.1 R251_3.1 R251_4.1 U200_2.7 | length 25.1
  Top Copper w0.254: JP207_2.1 v1(27.006,31.648) ; v1(27.381,26.924) JP206_2.1 ; JP205_2.1 28.526,14.127 v1(28.537,14.116) ; JP204_2.1 28.551,18.448 v1@28.563,18.459 ; v1(30.738,47.52) R251_4.1 ; IC250_4.14 33.667,51.34 33.979,51.029 36.322,51.029 37.172,51.878 C250_4.1 v1(38.075,51.105) ; v1(35.63,55.808) C400_2.1 ; v1(36.602,42.164) C200_2.1 ; C251_4.1 v1(38.913,47.383) ; v1(40.039,48.167) R251_3.1 ; v1(41.649,55.808) C401_2.1 ; v1(41.882,37.024) U200_2.7 ; IC250_3.14 43.802,51.34 44.088,51.054 46.66,51.054 47.459,51.853 C250_3.1 v1(48.285,51.13) ; v1(48.285,46.482) C251_3.1
  GND w0.254: v1@28.512,14.141 v1(28.537,14.116) ; v1(38.913,47.383) 39.255,47.383 v1(40.039,48.167) ; v1@48.311,51.156 v1@48.336,51.13
  other v1: 28.537,18.459
NetC400_1_2: C400_1.2 TR400_1.8 | length 1.9
  Top Copper w0.254: C400_1.2 TR400_1.8
NetC400_2_2: C400_2.2 TR400_2.8 | length 1.9
  Top Copper w0.254: C400_2.2 TR400_2.8
NetC401_1_2: C401_1.2 TR400_1.11 | length 1.9
  Top Copper w0.254: C401_1.2 TR400_1.11
NetC401_2_2: C401_2.2 TR400_2.11 | length 1.9
  Top Copper w0.254: C401_2.2 TR400_2.11
NetIC250_1_15: IC250_1.15 R250_1.1 R251_1.2 | length 5.2
  Top Copper w0.254: R251_1.2 R250_1.1 12.651,51.017 12.974,51.34 IC250_1.15
NetIC250_1_16: IC250_1.16 R250_1.2 | length 2.1
  Top Copper w0.254: R250_1.2 IC250_1.16
NetIC250_2_15: IC250_2.15 R250_2.1 R251_2.2 | length 5.4
  Top Copper w0.254: R251_2.2 R250_2.1 3.507,51.017 3.83,51.34 IC250_2.15
NetIC250_2_16: IC250_2.16 R250_2.2 | length 2.3
  Top Copper w0.254: R250_2.2 IC250_2.16
NetIC250_3_15: IC250_3.15 R250_3.1 R251_3.2 | length 5.1
  Top Copper w0.254: R251_3.2 R250_3.1 42.978,51.017 43.302,51.34 IC250_3.15
NetIC250_3_16: IC250_3.16 R250_3.2 | length 1.9
  Top Copper w0.254: R250_3.2 IC250_3.16
NetIC250_4_15: IC250_4.15 R250_4.1 R251_4.2 | length 5.1
  Top Copper w0.254: R251_4.2 30.738,50.565 R250_4.1 32.844,51.017 33.167,51.34 IC250_4.15
NetIC250_4_16: IC250_4.16 R250_4.2 | length 1.9
  Top Copper w0.254: R250_4.2 IC250_4.16
OUT_1_N: IC250_1.10 R401_1.2 TR400_1.12 | length 9
  Top Copper w0.254: IC250_1.10 15.474,53.5 15.922,53.949 15.922,54.74 15.672,54.991 R401_1.2 15.146,55.091 16.43,56.375 TR400_1.12
OUT_1_P: IC250_1.11 R401_1.1 TR400_1.10 | length 9.1
  Top Copper w0.254: TR400_1.10 12.417,56.42 13.746,55.091 R401_1.1 14.326,54.991 14.568,54.749 14.568,54.549 14.974,54.142 IC250_1.11
OUT_2_N: IC250_2.10 R400_1.2 TR400_1.9 | length 10.2
  Top Copper w0.254: IC250_2.10 6.33,53.494 6.684,53.848 7.366,53.848 7.83,54.312 8.525,54.312 9.104,54.891 R400_1.2 9.104,55.091 10.41,56.398 TR400_1.9
OUT_2_P: IC250_2.11 R400_1.1 TR400_1.7 | length 9.3
  Top Copper w0.254: IC250_2.11 5.83,53.496 6.854,54.52 7.333,54.52 7.704,54.891 R400_1.1 7.704,55.091 6.397,56.398 TR400_1.7
OUT_3_N: IC250_3.10 R401_2.2 TR400_2.12 | length 11.6
  Top Copper w0.254: TR400_2.12 43.656,56.398 42.349,55.091 R401_2.2 42.801,54.991 43,55.19 45.153,55.19 45.802,54.541 IC250_3.10
OUT_3_P: IC250_3.11 R401_2.1 TR400_2.10 | length 12.8
  Top Copper w0.254: TR400_2.10 39.643,56.398 40.949,55.091 R401_2.1 40.949,54.891 41.535,54.305 43.924,54.305 44.428,54.809 44.479,54.809 44.504,54.834 45.005,54.834 45.302,54.538 IC250_3.11
OUT_4_N: IC250_4.10 R400_2.2 TR400_2.9 | length 8.5
  Top Copper w0.254: IC250_4.10 35.667,54.228 36.33,54.891 R400_2.2 36.33,55.091 37.636,56.398 TR400_2.9
OUT_4_P: IC250_4.11 R400_2.1 TR400_2.7 | length 8.3
  Top Copper w0.254: TR400_2.7 33.623,56.398 34.93,55.091 R400_2.1 34.93,54.439 35.167,54.202 IC250_4.11
OUT_primary_N: J500.4 J502.2 TR400_1.1 | length 19.1
  Top Copper w0.381: TR400_1.1 16.43,77.977 18.034,79.581 18.034,82.006 J500.4 21.144,87.644 J502.2
OUT_primary_P: J500.3 J502.1 TR400_1.3 | length 24.3
  Top Copper w0.381: TR400_1.3 12.417,75.381 16.77,79.734 J500.3 15.494,82.006 15.494,83.82 16.256,84.582 17.184,84.582 20.066,87.464 20.066,90.454 21.144,91.532 J502.1
OUT_reverse_primary_N: J500.8 J503.2 TR400_1.4 | length 18.5
  Top Copper w0.381: TR400_1.4 10.41,77.558 12.974,80.122 12.974,81.985 J500.8 11.689,88.006 J503.2
OUT_reverse_primary_P: J500.7 J503.1 TR400_1.6 | length 23.2
  Top Copper w0.381: TR400_1.6 6.397,74.242 9.203,77.047 9.203,78.243 J500.7 10.363,82.057 10.363,89.676 J503.1
OUT_reverse_secondary_N: J501.6 J505.2 TR400_2.4 | length 31.5
  Top Copper w0.381: J505.2 24.73,86.111 J501.6 24.73,83.093 23.368,81.731 23.368,77.775 28.451,72.692 36.785,72.692 37.636,73.543 TR400_2.4
OUT_reverse_secondary_P: J501.5 J505.1 TR400_2.6 | length 28.8
  Top Copper w0.381: J505.1 29.666,91.935 29.666,89.556 29.048,88.938 28.467,88.938 26.103,86.574 26.103,82.103 J501.5 24.73,77.311 28.149,73.892 TR400_2.6
OUT_secondary_N: J501.2 J504.2 TR400_2.1 | length 25.5
  Top Copper w0.381: J501.2 35.989,83.27 36.079,83.36 ; J504.2 36.079,83.36 ; TR400_2.1 43.656,75.784 36.079,83.36
OUT_secondary_P: J501.1 J504.1 TR400_2.3 | length 30.7
  Top Copper w0.381: J504.1 36.079,91.642 35.025,90.588 35.025,89.11 30.744,84.829 29.367,84.829 28.612,84.074 28.612,81.928 J501.1 35.193,80.73 39.643,76.28 TR400_2.3
PHA_1: IC250_1.8 IC250_2.8 JP200_1.1 JP204_1.2 | length 49.7
  Top Copper w0.254: IC250_2.8 6.83,47.342 v1(7.309,46.863) ; JP200_1.1 v1(18.015,17.067) ; IC250_1.8 15.974,47.09 16.455,46.609 v1@16.455,44.628 ; v1(16.383,38.481) 16.408,38.506 v1(16.408,44.628)
  Bot Copper w0.254: v1(7.309,46.863) 7.356,46.91 7.356,47.721 9.246,49.611 12.096,49.611 14.219,47.488 14.219,46.817 v1(16.408,44.628) ; v1(16.383,38.481) 16.383,18.699 v1(18.015,17.067) v1@18.015,17.039
PHA_2: IC250_3.8 IC250_4.8 JP200_2.1 JP204_2.2 | length 51.1
  Top Copper w0.254: JP200_2.1 27.198,17.048 JP204_2.2 28.526,17.048 v1(28.537,17.037) ; IC250_4.8 36.167,47.09 36.496,46.761 v1@36.525,46.761 ; IC250_3.8 46.302,46.866 v1(46.482,46.685)
  Bot Copper w0.254: v1(28.537,17.037) 28.537,17.101 35.333,23.897 35.333,43.476 35.774,43.917 ; v1(36.525,46.711) 35.774,45.96 35.774,43.917 ; v1@36.525,46.761 v1@36.525,46.787 ; v1(46.482,46.685) 46.482,46.591 43.807,43.917 35.774,43.917
POL_1: IC250_1.7 IC250_2.7 JP201_1.1 JP205_1.2 | length 51.3
  Top Copper w0.254: v1@6.33,47.09 IC250_2.7 ; v1(14.172,35.388) 14.172,36.536 15.723,38.087 15.723,43.837 15.415,44.145 v1(15.415,46.494) 15.474,46.553 IC250_1.7 ; JP201_1.1 16.712,15.563 JP205_1.2 18.009,15.563 v1@18.026,15.546
  Bot Copper w0.254: v1@6.35,46.863 6.35,47.276 9.041,49.967 12.244,49.967 15.415,46.796 v1(15.415,46.494) ; v1(14.172,35.388) 14.172,19.417 v1(18.026,15.563)
  other v1: 6.33,46.863
POL_2: IC250_3.7 IC250_4.7 JP201_2.1 JP205_2.2 | length 54.5
  Top Copper w0.254: JP201_2.1 27.198,15.527 JP205_2.2 28.602,15.527 v1@28.613,15.538 ; v1(35.382,46.711) 35.382,46.806 35.667,47.09 IC250_4.7 ; v1(45.695,46.66) 45.802,46.767 IC250_3.7
  Bot Copper w0.254: v1(28.537,15.538) 27.612,16.464 27.612,17.156 28.098,17.642 28.576,17.642 34.978,24.044 34.978,43.754 35.382,44.158 v1(35.382,46.711) 35.987,47.316 36.776,47.316 37.13,46.961 37.13,46.307 39.076,44.361 43.396,44.361 v1(45.695,46.66)
SLOW_1: IC250_1.13 IC250_2.13 JP202_1.1 JP206_1.2 | length 44.8
  Top Copper w0.254: v1(4.521,53.873) 4.83,53.565 IC250_2.13 ; v1(13.233,54.127) 13.974,53.387 IC250_1.13 ; JP202_1.1 14.289,26.372 JP206_1.2 14.289,28.259 17.45,31.42 v1(17.45,44.729)
  Bot Copper w0.254: v1(4.521,53.873) 4.521,53.953 4.729,54.161 4.729,54.175 5.083,54.529 12.751,54.529 13.153,54.127 v1(13.233,54.127) 13.233,49.568 16.451,46.35 16.451,45.728 v1(17.45,44.729)
SLOW_2: IC250_3.13 IC250_4.13 JP202_2.1 JP206_2.2 | length 45.6
  Top Copper w0.254: JP202_2.1 29.594,25.771 JP206_2.2 30.179,26.924 v1(30.19,26.913) ; v1(33.299,54.127) 33.533,54.127 34.167,53.494 IC250_4.13 ; v1(40.589,53.95) 43.846,53.95 44.302,53.494 IC250_3.13
  Bot Copper w0.254: v1(30.19,26.913) 30.133,26.971 30.133,50.961 v1(33.299,54.127) 33.322,54.127 33.774,53.675 37.02,53.675 37.295,53.95 v1(40.589,53.95)
pads on no net: Designator11.Hole_3.2 Designator12.Hole_3.2 Designator13.Hole_3.2 Designator14.Hole_3.2 Designator38.0 Designator39.0 Designator40.0 J300_1.2 J300_1.11 J300_1.12 J300_1.13 J300_1.14 J300_1.15 J300_1.16 J300_2.2 J300_2.11 J300_2.12 J300_2.13 J300_2.14 J300_2.15 J300_2.16 J500.1 J500.2 J500.5 J500.6 J501.3 J501.4 J501.7 J501.8 J502. J503. J504. J505. TR400_1.2 TR400_1.5 TR400_2.2 TR400_2.5

## Polygon pours and split planes (outlines as drawn)
no net on Bottom Overlay "Polygon_21_NoNet" (solid): 21.459,17.678 18.669,17.678 18.668,18.251 19.882,18.251 19.884,19.189 20.338,19.189 20.339,18.251 21.002,18.253 21.003,19.236 21.459,19.235
no net on Bottom Overlay "Polygon_20_NoNet" (solid): 23 vertices, not listed, extent 18.667,19.594 20.785,20.814
no net on Bottom Overlay "Polygon_19_NoNet" (solid): 32 vertices, not listed, extent 18.622,20.949 19.931,21.897
no net on Bottom Overlay "Polygon_18_NoNet" (solid): 49 vertices, not listed, extent 18.637,21.169 20.781,22.811
no net on Bottom Overlay "Polygon_17_NoNet" (solid): 41 vertices, not listed, extent 18.623,23.198 20.736,25.093
no net on Bottom Overlay "Polygon_16_NoNet" (solid): 44 vertices, not listed, extent 18.667,25.62 20.782,27.509
no net on Bottom Overlay "Polygon_15_NoNet" (solid): 43 vertices, not listed, extent 18.668,28.034 21.661,29.927
no net on Bottom Overlay "Polygon_14_NoNet" (solid): 75 vertices, not listed, extent 18.622,30.239 20.785,32.398
no net on Bottom Overlay "Polygon_13_NoNet" (solid): 35 vertices, not listed, extent 18.666,32.509 21.71,33.959
no net on Bottom Overlay "Polygon_12_NoNet" (solid): 68 vertices, not listed, extent 18.619,34.093 20.772,36.025
no net on Bottom Overlay "Polygon_11_NoNet" (solid): 25 vertices, not listed, extent 18.613,36.324 20.842,37.673
no net on Bottom Overlay "Polygon_10_NoNet" (solid): 17.279,34.283 17.279,34.578 15.874,34.577 15.875,34.282
no net on Bottom Overlay "Polygon_9_NoNet" (solid): 17.279,34.916 17.279,35.2 15.874,35.2 15.876,34.917
no net on Bottom Overlay "Polygon_8_NoNet" (solid): 60 vertices, not listed, extent 15.852,35.489 17.303,36.377
no net on Bottom Overlay "Polygon_7_NoNet" (solid): 56 vertices, not listed, extent 15.875,36.644 17.283,37.612
no net on Bottom Overlay "Polygon_6_NoNet" (solid): 22.838,12.169 21.671,12.175 21.691,12.549 21.745,13.101 21.846,13.804 21.92,14.198 22.014,14.615 22.166,15.18 22.324,15.667 22.499,16.122 22.582,16.315 22.841,16.315
no net on Bottom Overlay "Polygon_5_NoNet" (solid): 35 vertices, not listed, extent 20.974,12.171 22.498,16.313
no net on Bottom Overlay "Polygon_4_NoNet" (solid): 35 vertices, not listed, extent 19.872,12.174 22.116,16.311
no net on Bottom Overlay "Polygon_3_NoNet" (solid): 31 vertices, not listed, extent 18.67,12.174 21.609,16.313
no net on Bottom Overlay "Polygon_2_NoNet" (solid): 50 vertices, not listed, extent 18.668,12.544 21.117,16.314
no net on Bottom Overlay "Polygon_1_NoNet" (solid): 24 vertices, not listed, extent 18.669,13.637 20.707,16.313
no net on Bottom Overlay "Polygon_28_NoNet" (solid): 61 vertices, not listed, extent 30.458,58.677 33.254,63.468
no net on Bottom Overlay "Polygon_27_NoNet" (solid): 60 vertices, not listed, extent 28.242,59.645 30.779,62.44
no net on Bottom Overlay "Polygon_26_NoNet" (solid): 53 vertices, not listed, extent 25.454,59.651 28.252,62.44
no net on Bottom Overlay "Polygon_25_NoNet" (solid): 69 vertices, not listed, extent 22.161,59.681 24.395,62.833
no net on Bottom Overlay "Polygon_24_NoNet" (solid): 33 vertices, not listed, extent 18.729,59.662 21.514,62.851
no net on Bottom Overlay "Polygon_23_NoNet" (solid): 75 vertices, not listed, extent 15.903,59.654 18.096,62.86
no net on Bottom Overlay "Polygon_22_NoNet" (solid): 105 vertices, not listed, extent 13.326,57.778 34.842,64.725
no net on Bottom Overlay "Polygon_45_NoNet" (solid, pour order 1): 33 vertices, not listed, extent 32.941,6.88 33.47,7.411
no net on Bottom Overlay "Polygon_44_NoNet" (solid, pour order 6): 17 vertices, not listed, extent 32.706,5.051 33.706,6.808
no net on Bottom Overlay "Polygon_43_NoNet" (solid, pour order 16): 133 vertices, not listed, extent 31.387,4.412 35.025,8.052
no net on Bottom Overlay "Polygon_39_NoNet" (solid, pour order 2): 59 vertices, not listed, extent 36.339,5.657 37.383,6.805
no net on Bottom Overlay "Polygon_38_NoNet" (solid, pour order 3): 58 vertices, not listed, extent 37.385,5.657 38.428,6.805
no net on Bottom Overlay "Polygon_37_NoNet" (solid, pour order 14): 134 vertices, not listed, extent 35.568,4.412 39.205,8.05
no net on Bottom Overlay "Polygon_42_NoNet" (solid, pour order 0): 33 vertices, not listed, extent 32.941,6.88 33.47,7.411
no net on Bottom Overlay "Polygon_41_NoNet" (solid, pour order 7): 17 vertices, not listed, extent 32.706,5.051 33.706,6.808
no net on Bottom Overlay "Polygon_40_NoNet" (solid, pour order 15): 133 vertices, not listed, extent 31.387,4.412 35.025,8.052
no net on Top Overlay "Polygon_22_NoNet" (solid): 105 vertices, not listed, extent 13.906,1.77 35.422,8.718
no net on Top Overlay "Polygon_23_NoNet" (solid): 75 vertices, not listed, extent 30.652,3.647 32.846,6.852
no net on Top Overlay "Polygon_24_NoNet" (solid): 33 vertices, not listed, extent 27.234,3.655 30.02,6.844
no net on Top Overlay "Polygon_25_NoNet" (solid): 69 vertices, not listed, extent 24.353,3.673 26.587,6.826
no net on Top Overlay "Polygon_26_NoNet" (solid): 53 vertices, not listed, extent 20.496,3.643 23.294,6.433
no net on Top Overlay "Polygon_27_NoNet" (solid): 60 vertices, not listed, extent 17.969,3.638 20.506,6.433
no net on Top Overlay "Polygon_28_NoNet" (solid): 61 vertices, not listed, extent 15.494,2.669 18.29,7.46
no net on Top Overlay "Polygon_36_NoNet" (solid, pour order 44): 46.427,83.989 46.427,99.33 41.449,99.33 41.449,83.989
GND_0 on GND "Polygon_1_Net_GND_0" (solid, remove dead copper, pour order 46): -0.076,-0.076 -0.076,57.406 18.669,57.406 18.674,-0.076
GND_1 on GND "Polygon_1_Net_GND_1" (solid, remove dead copper, pour order 48): 22.826,-0.076 22.783,57.407 50.076,57.406 50.076,-0.076
+3.3V_0 on Supply "Polygon_1_Net_+3.3V_0" (solid, remove dead copper, pour order 45): -0.076,-0.076 -0.076,57.406 18.669,57.406 18.669,-0.076
+3.3V_1 on Supply "Polygon_1_Net_+3.3V_1" (solid, remove dead copper, pour order 47): 22.826,-0.076 22.783,57.407 50.076,57.406 50.076,-0.076

## Keep-outs
Top Copper:
  rectangle: 20.4,40.2 29.6,62
Keep-Out Layer:
  lines w0: 0,1 0,99 cw(c1,99) 1,100 49,100 cw(c49,99) 50,99 50,1 cw(c49,1) 49,0 1,0

## Silkscreen, mask and mechanical layers (free items; w line width, h text height)
Top Overlay:
  drawing of 73 lines, arcs and shapes, not listed
  text "foxBMS.org" at 48.608,85.236 h2.76 r90
  text "foxBMS BMS-Interface v'.GlobalVersion'" at 41.109,84.22 h1.27 r90
  text "Enable" at 25.956,36.488 h1.27
  text "Enable" at 14.75,36.463 h1.27
  text "High" at 27.155,34.257 h1.27
  text "High" at 15.909,34.238 h1.27
  text "Low" at 16.077,31.332 h1.27
  text "Low" at 27.372,31.314 h1.27
  text "Slow" at 24.581,28.175 h1.2
  text "Slow" at 15.76,28.136 h1.2
  text "Low" at 16.064,26.534 h1.27
  text "Low" at 24.619,26.525 h1.27
  text "High" at 15.909,24.982 h1.27
  text "High" at 24.606,24.983 h1.27
  text "SPI CLK" at 26.607,19.78 h1.27
  text "SPI CLK" at 12.057,19.618 h1.27
  text "Phase" at 29.533,17.464 h1.27
  text "Phase" at 10.279,17.293 h1.27
  text "Pol." at 30.155,14.543 h1.27
  text "Pol." at 10.901,14.481 h1.27
  text "HI" at 14.399,11.94 h1.27
  text "LO" at 16.679,11.932 h1.27
  text "HI" at 24.956,11.906 h1.27
  text "LO" at 27.242,11.906 h1.27
Bottom Overlay:
  text "PRIMARY" at 19.874,94.41 h1.27
  text "SECONDARY" at 35.918,94.41 h1.27
  text "P" at 38.941,92.652 h1.27
  text "N" at 38.941,89.604 h1.27
  text "reverse" at 15.508,87.938 h1.27
  text "reverse" at 30.444,87.938 h1.27
  text "forward" at 22.989,87.826 h1.27